# EAGLE board repeater_opto (EAGLE 8.4.1)
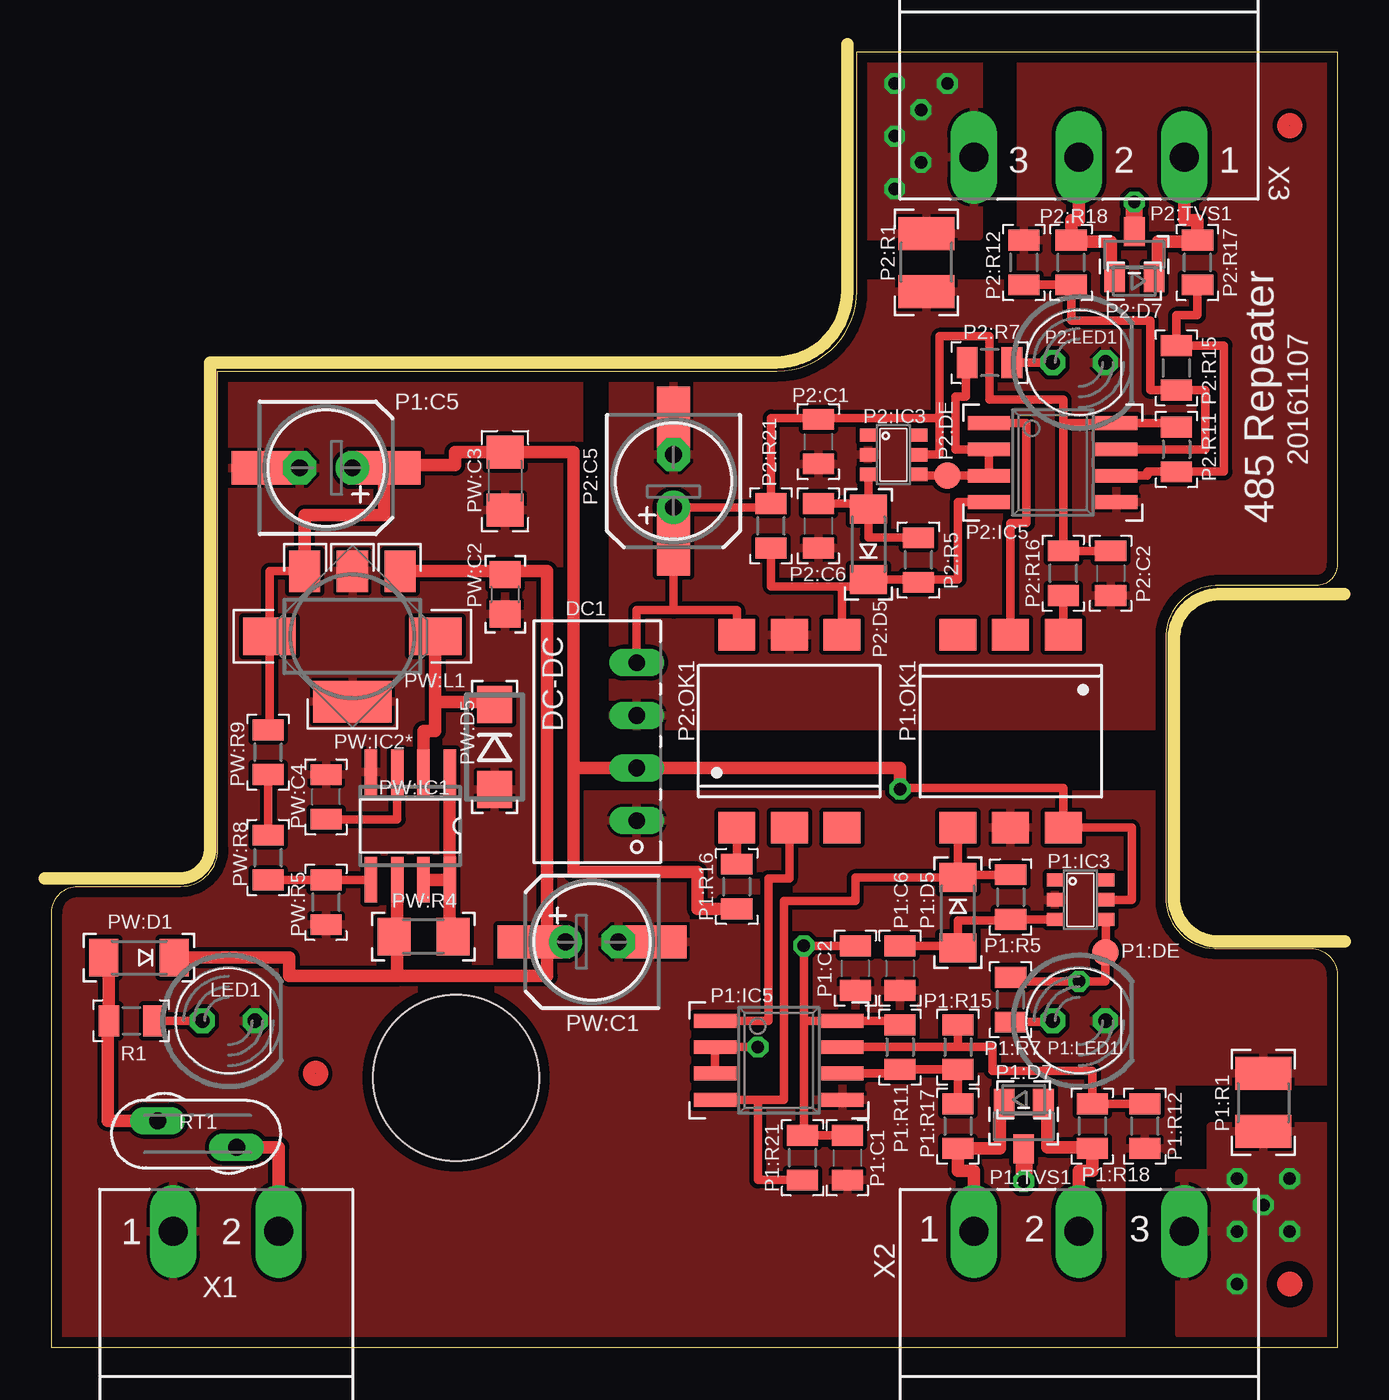
[diagram p0: board, top side]
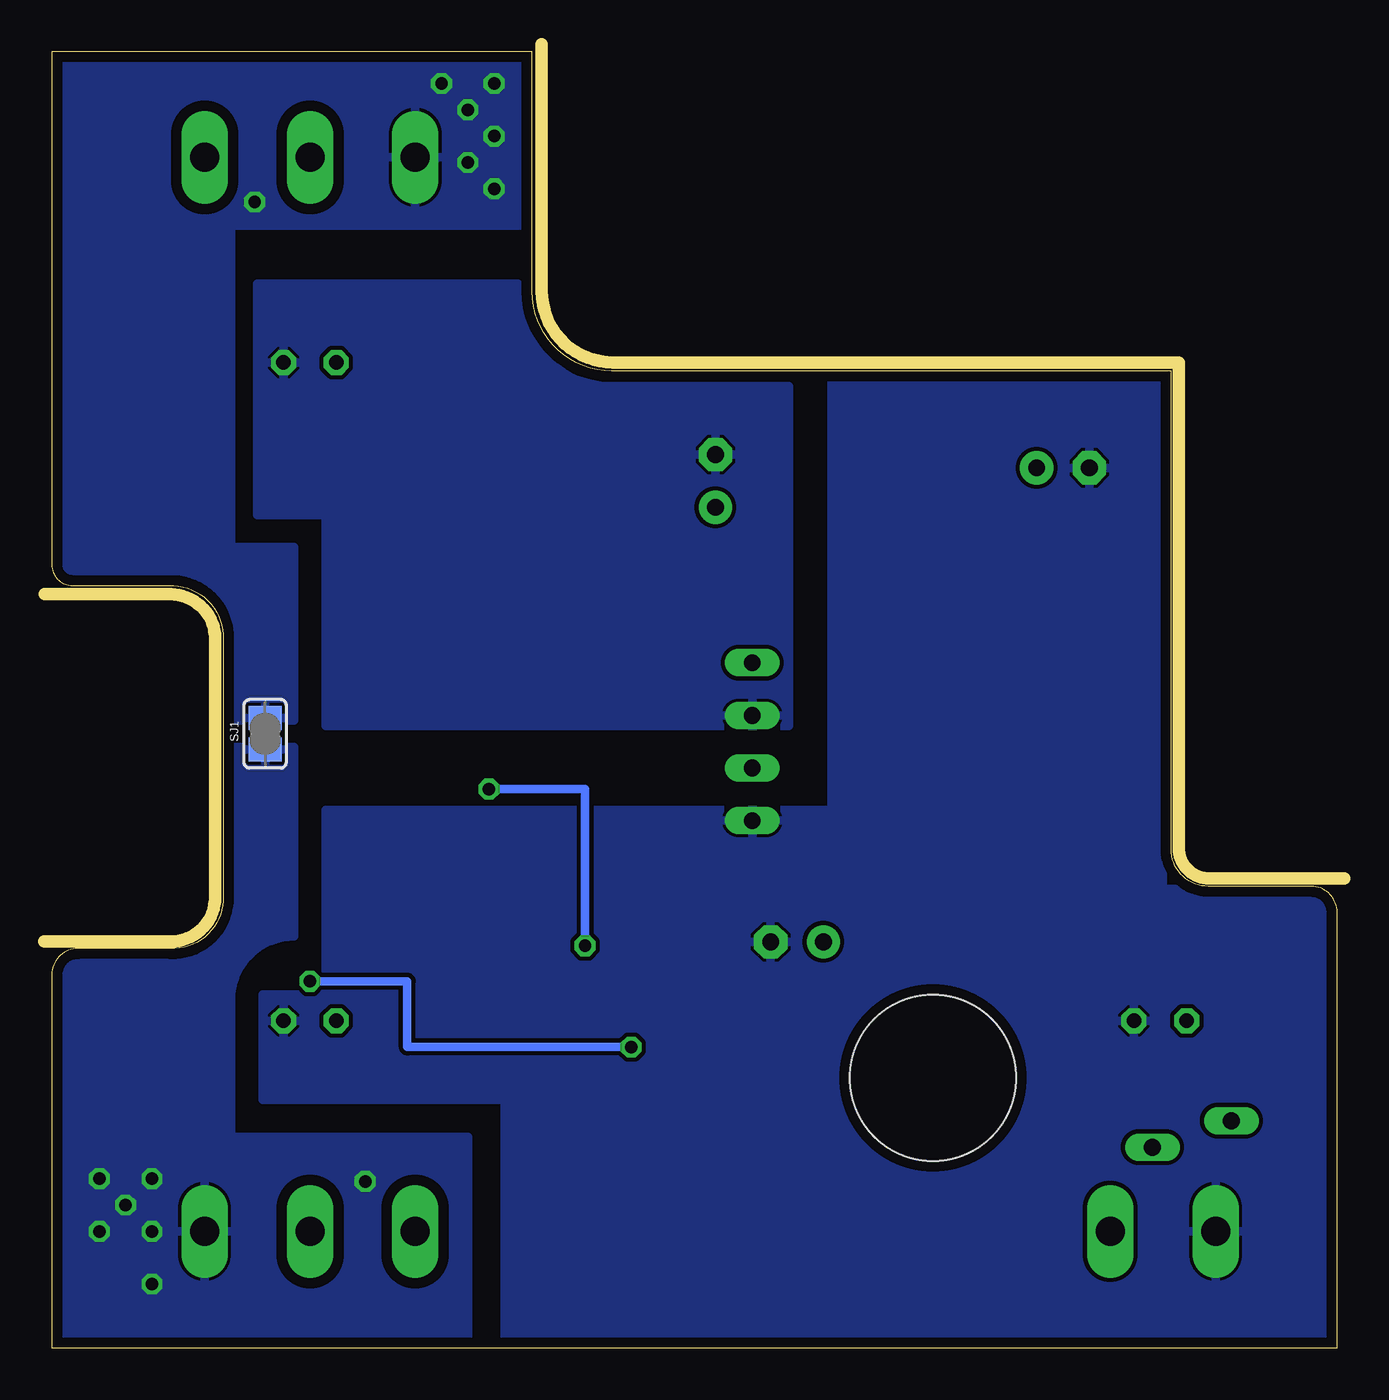
[diagram p1: board, bottom side, seen from below]

Size 62 x 62.51 mm. Coordinates in mm from the lower left corner, seen from the top.
Copper layers (1*16): Top 0.035mm / dielectric 1.5mm / Bottom 0.035mm
Design rules "default *": minimum track width 10mil, minimum drill 20mil, track to track 8mil, track to pad 8mil, pad to pad 8mil, via to via 8mil, smd to smd 8mil, copper to edge 20mil, drill to drill 8mil, minimum pad ring 10mil, minimum via ring 8mil, stop-mask expansion 4mil, vias tented up to drill 40mil, thermal gap 6mil
Net classes: 0 default: clearance 0.205 mm; 1 power: clearance 0.305 mm to class 0, clearance 0.305 mm; 2 pe: clearance 0.508 mm to class 0, clearance 0.508 mm to class 1, clearance 0.508 mm
Milling: 11 lines

## Footprints (pad centres in the part's own frame; a part is rotated, then mirrored left to right if it is on the bottom)
NME = drill 0.813 long: 1 0,3.81; 2 0,1.27; 3 0,-1.27; 4 0,-3.81
LED5MM = drill 0.7 octagon: A -1.27,0; K 1.27,0
C0805 = smd 1 x 1.5: 1 -1.077,0; 2 1.077,0
SANYO-OSCON_SMD_C6 = smd 3.5 x 1.6: + 2.8,0; - -2.8,0
E2,5-6 = drill 0.813 pad 1.6: + -1.27,0 | drill 0.813 pad 1.6 octagon: - 1.27,0
MINIMELF = smd 1.4 x 1.8: A 1.7,0; C -1.7,0
SOD323-R = smd 0.6 x 0.6: A 1.1,0; C -1.1,0
B1,27 = smd 1.27 x 1.27: PP 0,0
SOT23-6 = smd 0.64 x 0.8: 1 -0.95,-1.29; 2 0,-1.29; 3 0.95,-1.29; 4 0.95,1.173; 5 0,1.173; 6 -0.95,1.173
ESOP-8 = smd 0.66 x 2.032: 1 -1.905,-3.073; 2 -0.635,-3.073; 3 0.635,-3.073; 4 1.905,-3.073; 5 1.905,3.073; 6 0.635,3.073; 7 -0.635,3.073; 8 -1.905,3.073
DIL6-SMD = smd 1.78 x 1.52: 1 -2.54,-4.645; 2 0,-4.645; 3 2.54,-4.645; 4 2.54,4.645; 5 0,4.645; 6 -2.54,4.645
R1210 = smd 1.6 x 2.7: 1 -1.4,0; 2 1.4,0
R0805 = smd 1 x 1.5: 1 -1.077,0; 2 1.077,0
SOT23 = smd 1 x 1.4: 1 -0.95,-1.1; 2 0.95,-1.1; 3 0,1.1
C0805' = smd 1.3 x 1.5: 1 -0.95,0; 2 0.95,0
C1206 = smd 1.6 x 1.8: 1 -1.4,0; 2 1.4,0
DO214BA = smd 1.8 x 1.7: A 2.05,0; C -2.05,0
SO08 = smd 0.6 x 2.2: 1 -1.905,-2.6; 2 -0.635,-2.6; 3 0.635,-2.6; 4 1.905,-2.6; 5 1.905,2.6; 6 0.635,2.6; 7 -0.635,2.6; 8 -1.905,2.6
SOT223 = smd 1.5 x 2: 1 -2.3,-3.15; 2 0,-3.15; 3 2.3,-3.15 | smd 3.8 x 2: 4 0,3.15
DR1030 = smd 2.54 x 1.8: 1 -4,0; 2 4,0
R1206 = smd 1.6 x 1.803: 1 -1.422,0; 2 1.422,0
X40 = drill 0.813 long: 1 0,0; 2 3.81,-1.27
SJ = smd 1.168 x 1.6: 1 -0.762,0; 2 0.762,0
PLOKSTE_ISPJAUTA = hole 8: -11,-18
MSTBA2 = drill 1.4 long: 1 -2.54,5.08; 2 2.54,5.08
MSTBA3 = drill 1.4 long: 1 -5.08,5.08; 2 0,5.08; 3 5.08,5.08

## Placement (x,y rotation side)
DC1  5V/5V  [NME]  28.21,29.23 180 top
LED1  Power  [LED5MM]  8.53,15.77 0 top
P1:C1  0.1  [C0805]  38.37,9.16 270 top
P1:C2  0.1  [C0805]  38.76,18.31 270 top
P1:C5  100x16V  [SANYO-OSCON_SMD_C6]  13.23,42.44 0 top
P1:C6  0.1  [C0805]  40.91,18.31 270 top
P1:C7  100x16V  [E2,5-6]  13.23,42.44 180 top
P1:D5  BAS85  [MINIMELF]  43.71,20.97 270 top
P1:D7  PESD1LIN  [SOD323-R]  46.88,11.96 0 top
P1:DE  TPB1,27  [B1,27]  50.82,19.07 0 top
P1:IC3  74LVC2G14DBV  [SOT23-6]  49.68,21.61 270 top
P1:IC5  MAX485CSA  [ESOP-8]  35.07,13.86 270 top
P1:LED1  Link  [LED5MM]  49.55,15.77 0 top
P1:OK1  H11L1MS  [DIL6-SMD]  46.25,29.74 180 top
P1:R1  100  [R1210]  58.44,11.83 270 top
P1:R5  10k  [R0805]  46.25,21.74 270 top
P1:R7  10k  [R0805]  46.25,16.78 90 top
P1:R11  4.7k  [R0805]  40.91,14.5 270 top
P1:R12  4.7k  [R0805]  52.73,10.69 90 top
P1:R15  120  [R0805]  43.71,14.5 270 top
P1:R16  470  [R0805]  33.04,22.24 270 top
P1:R17  10  [R0805]  43.71,10.69 270 top
P1:R18  10  [R0805]  50.19,10.69 270 top
P1:R21  4k7  [R0805]  36.22,9.16 90 top
P1:TVS1  SM712  [SOT23]  46.88,10.69 180 top
P2:C1  0.1  [C0805]  36.98,43.71 270 top
P2:C2  0.1  [C0805]  51.07,37.36 270 top
P2:C5  100x16V  [SANYO-OSCON_SMD_C6]  29.99,41.8 270 top
P2:C6  0.1  [C0805]  36.98,39.64 270 top
P2:C7  100x16V  [E2,5-6]  29.99,41.8 90 top
P2:D5  BAS85  [MINIMELF]  39.39,38.75 90 top
P2:D7  PESD1LIN  [SOD323-R]  52.22,51.45 180 top
P2:DE  TPB1,27  [B1,27]  43.2,42.06 0 top
P2:IC3  74LVC2G14DBV  [SOT23-6]  40.66,43.07 270 top
P2:IC5  MAX485CSA  [ESOP-8]  48.28,42.69 270 top
P2:LED1  Link  [LED5MM]  49.55,47.52 0 top
P2:OK1  H11L1MS  [DIL6-SMD]  35.58,29.74 0 top
P2:R1  100  [R1210]  42.18,52.34 90 top
P2:R5  10k  [R0805]  41.8,37.99 90 top
P2:R7  10k  [R0805]  45.23,47.52 180 top
P2:R11  4.7k  [R0805]  54.25,43.33 270 top
P2:R12  4.7k  [R0805]  46.88,52.34 270 top
P2:R15  120  [R0805]  54.25,47.26 90 top
P2:R16  470  [R0805]  48.79,37.36 90 top
P2:R17  10  [R0805]  55.27,52.34 90 top
P2:R18  10  [R0805]  49.17,52.34 90 top
P2:R21  4k7  [R0805]  34.69,39.64 90 top
P2:TVS1  SM712  [SOT23]  52.22,52.72 0 top
PW:C1  47x50V  [SANYO-OSCON_SMD_C6]  26.05,19.58 180 top
PW:C2  10n  [C0805']  21.86,36.34 270 top
PW:C3  1.0  [C1206]  21.86,41.8 270 top
PW:C4  470  [C0805]  13.23,26.56 90 top
PW:C6  47x50V  [E2,5-6]  26.05,19.58 0 top
PW:D1  BAS32  [MINIMELF]  4.21,18.82 180 top
PW:D5  10MQ100  [DO214BA]  21.36,28.98 270 top
PW:IC1  MC34063AD  [SO08]  17.29,25.17 180 top
PW:IC2*  LM340-DCY  [SOT223]  14.5,34.31 180 top
PW:L1  330uH  [DR1030]  14.5,34.31 180 top
PW:R4  1.0  [R1206]  17.93,19.83 0 top
PW:R5  4k7  [R0805]  13.23,21.48 90 top
PW:R8  12k  [R0805]  10.43,23.64 90 top
PW:R9  2k  [R0805]  10.43,28.72 90 top
R1  4k7  [R0805]  3.83,15.77 0 top
RT1  400mA  [X40]  8.91,9.67 180 top
SJ1  [SJ]  51.71,29.61 90 bottom
U$2  [PLOKSTE_ISPJAUTA]  30.5,31.01 0 top
X1  POWER  [MSTBA2]  8.4,0.53 0 top
X2  SIDE A  [MSTBA3]  49.55,0.53 0 top
X3  SIDE B  [MSTBA3]  49.55,62.5 180 top

## Library data of the parts
DC1 = dc-dc-converter
LED1 P1:LED1 P2:LED1 = led
P1:C1 P1:C2 P1:C6 P1:R1 P1:R5 P1:R7 P1:R11 P1:R12 P1:R15-P1:R18 P1:R21 P2:C1 P2:C2 P2:C6 P2:R1 P2:R5 P2:R7 P2:R11 P2:R12 P2:R15-P2:R18 P2:R21 R1 = rcl
P1:C5 P1:C7 P2:C5 P2:C7 PW:C1 PW:C6 = rcl; PRICE: 1.10
P1:D5 P2:D5 PW:D1 PW:D5 = diode
P1:D7 P1:IC3 P1:TVS1 P2:D7 P2:IC3 P2:TVS1 U$2 = repeater
P1:DE P2:DE = testpad
P1:IC5 P2:IC5 = linear; VENT_CODE: ZELM048
P1:OK1 P2:OK1 = optocoupler
PW:C2 = touch; NOM_NR: ZKN
PW:C3 PW:C4 PW:R5 PW:R8 PW:R9 = rcl; PRICE: 0.01
PW:IC1 = touch; VENT_CODE: ZELM041
PW:IC2* PW:L1 = touch
PW:R4 = touch; NOM_NR: ZELRS019; PRICE: 0.02
RT1 = descreet
SJ1 = jumper
X1-X3 = con-phoenix-508

## Nets
+24V [power]: PW:D1.A R1.1 RT1.2
GND1: DC1.1 LED1.K P1:C1.2 P1:C2.2 P1:C5.- P1:C6.2 P1:C7.- P1:IC3.2 P1:IC5.5 P1:LED1.K P1:OK1.5 P1:R1.1 P1:R12.1 PW:C1.- PW:C2.2 PW:C3.2 PW:C4.2 PW:C6.- PW:D5.A PW:IC1.4 PW:IC2*.2 PW:IC2*.4 PW:R5.1 X1.1
GND2: DC1.3 P2:C1.2 P2:C2.2 P2:C5.- P2:C6.2 P2:C7.- P2:IC3.2 P2:IC5.5 P2:LED1.K P2:OK1.5 P2:R1.1 P2:R12.1
N$1: LED1.A R1.2
N$2 [power]: RT1.1 X1.2
N$12: P1:R16.1 P2:OK1.1
N$13: P1:IC5.1 P2:OK1.2
N$14: P1:OK1.1 P2:R16.1
N$15: P1:OK1.2 P2:IC5.1
P1:LED+: P1:DE.PP P1:IC3.4 P1:IC5.2 P1:IC5.3 P1:R7.2
P1:N$1: P1:LED1.A P1:R7.1
P1:N$2: P1:IC5.7 P1:R12.2 P1:R15.1 P1:R18.1
P1:N$3: P1:IC5.6 P1:R11.2 P1:R15.2 P1:R17.1
P1:N$7: P1:C6.1 P1:D5.A P1:IC3.3 P1:R5.2
P1:RX: P1:D5.C P1:IC5.4 P1:OK1.4 P1:R5.1 P1:R21.1
P2:LED+: P2:DE.PP P2:IC3.4 P2:IC5.2 P2:IC5.3 P2:R7.2
P2:N$1: P2:LED1.A P2:R7.1
P2:N$2: P2:IC5.7 P2:R12.2 P2:R15.1 P2:R18.1
P2:N$3: P2:IC5.6 P2:R11.2 P2:R15.2 P2:R17.1
P2:N$7: P2:C6.1 P2:D5.A P2:IC3.3 P2:R5.2
P2:RX: P2:D5.C P2:IC5.4 P2:OK1.4 P2:R5.1 P2:R21.1
PE1 [pe]: P1:R1.2 P1:TVS1.3 SJ1.1 X2.3
PE2 [pe]: P2:R1.2 P2:TVS1.3 SJ1.2 X3.3
PW:N$2 [power]: PW:C1.+ PW:C2.1 PW:C6.+ PW:D1.C PW:IC1.6 PW:IC2*.1 PW:R4.1
PW:N$29 [power]: PW:IC1.1 PW:IC1.7 PW:IC1.8 PW:R4.2
PW:N$30: PW:C4.1 PW:IC1.3
PW:N$33: PW:R8.2 PW:R9.1
PW:N$34: PW:IC1.5 PW:R5.2 PW:R8.1
PW:N$35 [power]: PW:D5.C PW:IC1.2 PW:L1.1
RS1A: P1:D7.C P1:R17.2 P1:TVS1.2 X2.1
RS1B: P1:D7.A P1:R18.2 P1:TVS1.1 X2.2
RS2A: P2:D7.C P2:R17.2 P2:TVS1.2 X3.1
RS2B: P2:D7.A P2:R18.2 P2:TVS1.1 X3.2
VCC1 [power]: DC1.2 P1:C1.1 P1:C2.1 P1:C5.+ P1:C7.+ P1:IC3.5 P1:IC5.8 P1:OK1.6 P1:R11.1 P1:R16.2 P1:R21.2 PW:C3.1 PW:IC2*.3 PW:L1.2 PW:R9.2
VCC2 [power]: DC1.4 P2:C1.1 P2:C2.1 P2:C5.+ P2:C7.+ P2:IC3.5 P2:IC5.8 P2:OK1.6 P2:R11.1 P2:R16.2 P2:R21.2

## Tracks (layer width: path | path; a pad name or v marks a point on that pad's centre or on a via)
+24V
  Top 0.61: RT1.2 2.69,10.94 2.69,15.77 R1.1 2.75,18.82 PW:D1.A
GND1
  pour Top: 51.58,0.53 0.02,0.53 0.02,20.85 0.04,20.85 0.02,46.88 arc-1 25.42,46.63 25.42,26.69 62.25,26.69 62.25,12.85 53.99,12.85 53.99,9.54 51.58,9.54
  pour Bottom: 0.02,0.02 0.02,22.12 8.4,22.12 8.4,47.01 24.4,47.01 24.4,25.93 48.79,25.93 48.79,17.04 51.84,17.04 51.84,11.96 40.15,11.96 40.15,0.02
GND2
  pour Top: 27.07,46.76 34.31,46.76 34.31,51.33 46.76,51.33 46.76,62.76 62.25,62.76 62.25,29.99 27.07,29.99
  pour Bottom: 26.44,29.99 48.79,29.99 48.79,40.15 52.09,40.15 52.09,51.33 39.52,51.33 39.52,50.92 arc-90 34.97,46.38 26.44,46.38
N$1
  Top 0.406: LED1.A R1.2
N$2
  Top 0.61: X1.2 10.94,9.67 RT1.1
N$3
  Bottom 0.406: 51.71,29.99 51.71,29.36
N$12
  Top 0.406: P1:R16.1 P2:OK1.1
N$13
  Top 0.406: P1:IC5.1 34.56,15.77 34.56,22.63 35.58,22.63 P2:OK1.2
N$14
  Top 0.406: P1:OK1.1 P2:R16.1
N$15
  Top 0.406: P2:IC5.1 47.01,44.6 47.01,39.77 46.25,39.77 P1:OK1.2
P1:LED+  (via drill 0.6)
  Top 0.406: P1:IC5.3 P1:IC5.2 v34.06,14.5 | P1:IC3.4 50.85,19.07 P1:DE.PP 50.82,17.67 v49.55,17.67 46.25,17.67 P1:R7.2
  Bottom 0.406: v34.06,14.5 44.85,14.5 44.85,17.67 v49.55,17.67
P1:N$1
  Top 0.406: P1:R7.1 48.28,15.71 P1:LED1.A
P1:N$2
  Top 0.406: P1:IC5.7 43.71,14.5 | 43.71,14.5 P1:R15.1 | P1:R12.2 P1:R18.1 50.19,13.35 45.36,13.35 45.36,14.5 43.71,14.5
P1:N$3
  Top 0.406: P1:R17.1 P1:R15.2 P1:R11.2 40.91,13.23 P1:IC5.6
P1:N$7
  Top 0.406: 43.71,18.88 P1:D5.A | P1:D5.A 43.71,20.61 46.25,20.61 P1:R5.2 P1:IC3.3 | P1:C6.1 43.71,19.38 P1:D5.A
P1:RX
  Top 0.406: P1:IC5.4 34.06,11.96 | 34.06,11.96 35.33,11.96 35.33,21.54 38.76,21.54 38.76,22.68 P1:D5.C | P1:R5.1 43.71,22.81 P1:D5.C | P1:OK1.4 P1:D5.C | 34.06,11.96 34.06,8.09 P1:R21.1
P2:LED+
  Top 0.406: P2:IC3.4 41.83,42.06 42.69,42.06 P2:DE.PP P2:IC5.3 P2:IC5.2 43.58,43.33 43.58,45.87 44.09,45.87 44.09,47.52 P2:R7.2
P2:N$1
  Top 0.406: P2:R7.1 P2:LED1.A
P2:N$2
  Top 0.406: P2:R12.2 P2:R18.1 49.17,49.55 52.98,49.55 52.98,46.19 P2:R15.1 55.65,46.19 55.65,43.33 P2:IC5.7
P2:N$3
  Top 0.406: P2:IC5.6 52.85,42.06 52.85,42.25 P2:R11.2 56.53,42.25 56.53,48.34 P2:R15.2 54.25,49.8 55.27,49.8 P2:R17.1
P2:N$7
  Top 0.406: P2:D5.A 39.39,40.73 | P2:D5.A 39.39,39.9 39.39,39.07 P2:R5.2 | P2:IC3.3 39.39,42.12 P2:D5.A | P2:C6.1 39.39,40.72 P2:D5.A
P2:RX
  Top 0.406: P2:IC5.4 43.71,40.79 43.71,37.05 41.93,37.05 | 39.39,36.79 P2:D5.C | P2:OK1.4 38.12,36.72 | 38.12,36.72 39.39,36.72 P2:D5.C | P2:D5.C 41.93,37.05 | P2:R5.1 41.93,36.92 41.93,37.05 | 38.12,36.72 34.69,36.72 P2:R21.1
PE1  (via drill 0.6)
  Top 0.813: P1:TVS1.3 v46.88,8.02
  other vias: 57.17,5.61 57.17,3.07 59.71,5.61 58.44,6.88 59.71,8.15 57.17,8.15
  pour Bottom: 41.93,0.02 41.93,10.18 53.36,10.18 53.36,16.78 arc90 50.31,19.83 50.31,28.98 53.61,28.98 53.61,21.67 arc90 55.96,19.32 62.25,19.32 62.25,0.02
  pour Top: 54.38,8.4 55.9,8.4 55.9,10.69 61.62,10.69 61.62,0.65 54.38,0.65
PE2  (via drill 0.6)
  Top 0.813: P2:TVS1.3 v52.22,55.27
  other vias: 40.66,55.9 41.93,57.17 40.66,58.44 41.93,59.71 40.66,60.98 43.2,60.98
  pour Bottom: 50.31,30.25 50.31,38.63 53.36,38.63 53.36,54.12 38.88,54.12 38.88,62.76 61.74,62.76 61.74,36.85 55.77,36.85 arc90 53.61,34.69 53.61,30.25
  pour Top: 38.88,62.76 44.72,62.76 44.72,53.61 38.88,53.61
PW:N$2
  Top 0.406: PW:C6.+ 23.9,19.58 | PW:C2.1 21.61,37.29 21.61,37.46
  Top 0.61: 23.9,19.58 23.9,17.93 16.66,17.93 | PW:C1.+ 23.9,19.58 | 23.9,19.58 23.9,37.46 21.61,37.46 PW:IC2*.1 | 16.66,19.58 PW:IC1.6 | PW:R4.1 16.66,19.58 | 16.66,19.58 16.66,17.93 | PW:D1.C 11.45,18.82 11.45,17.93 16.66,17.93
PW:N$29
  Top 0.61: PW:IC1.1 PW:IC1.8 | PW:IC1.7 PW:IC1.8 | PW:IC1.8 19.2,19.83 PW:R4.2
PW:N$30
  Top 0.406: PW:C4.1 16.66,25.49 PW:IC1.3
PW:N$33
  Top 0.406: PW:R9.1 PW:R8.2
PW:N$34
  Top 0.406: PW:IC1.5 12.97,22.57 PW:R5.2 12.97,22.56 PW:R8.1
PW:N$35
  Top 0.61: PW:IC1.2 17.93,29.74 18.5,29.74 18.5,31.13 | 21.36,31.01 PW:D5.C 21.36,31.13 18.5,31.13 | PW:L1.1 18.5,31.13
RS1A
  Top 0.406: 45.74,11.79 P1:TVS1.2 45.93,11.96 P1:D7.C
  Top 0.61: X2.1 44.47,8.53 43.71,8.53 P1:R17.2 45.74,9.61 45.74,11.79
RS1B
  Top 0.406: 48.03,11.79 P1:TVS1.1 47.83,11.96 P1:D7.A | 50.19,9.67 P1:R18.2
  Top 0.61: X2.2 49.55,8.53 50.19,8.53 P1:R18.2 | 48.03,11.79 48.03,9.67 50.19,9.67
RS2A
  Top 0.406: P2:TVS1.2 53.32,51.62 | 55.27,53.36 P2:R17.2 | 53.36,51.62 53.32,51.62 | 53.32,51.62 P2:D7.C
  Top 0.61: X3.1 54.63,54.38 55.27,54.38 P2:R17.2 | 53.36,51.62 53.36,53.36 55.27,53.36
RS2B
  Top 0.406: P2:TVS1.1 51.12,51.62 | 49.17,53.36 P2:R18.2 | 51.07,51.62 51.12,51.62 | 51.12,51.62 P2:D7.A
  Top 0.61: X3.2 49.55,54.38 49.17,54.38 P2:R18.2 | 51.07,51.62 51.07,53.36 49.17,53.36
VCC1  (via drill 0.6)
  Top 0.406: PW:IC2*.3 10.5,37.46 PW:L1.2 10.5,29.8 PW:R9.2 | P1:IC3.5 52.09,21.61 52.09,25.09 P1:OK1.6 48.79,27 40.91,27 v40.91,26.94 | P1:R11.1 40.91,15.77 P1:IC5.8 36.28,15.77 | P1:C2.1 v36.28,19.38 | 36.28,15.77 v36.28,19.38 | P1:C1.1 P1:R21.2 36.28,10.24 36.28,15.77 | v36.28,19.38 v36.28,19.39
  Top 0.61: PW:IC2*.3 12.2,40.15 16.03,40.15 P1:C5.+ | P1:C7.+ P1:C5.+ | P1:C5.+ 16.79,42.56 19.45,42.56 19.45,43.2 20.34,43.2 PW:C3.1 25.17,43.2 25.17,27.96 | 25.17,27.96 DC1.2 40.91,27.96 v40.91,26.94 | 25.17,27.96 25.17,22.95 31.13,22.95 31.13,21.17 P1:R16.2
  Bottom 0.406: v40.91,26.94 36.28,26.94 v36.28,19.39
VCC2
  Top 0.406: P2:C2.1 P2:R16.2 48.79,44.6 | P2:R11.1 54.25,44.6 P2:IC5.8 48.79,44.6 | 36.98,44.85 34.69,44.85 P2:R21.2 34.69,40.53 P2:C7.+ P2:C5.+ 29.99,35.58 | 36.98,44.85 42.82,44.85 | P2:OK1.6 33.04,35.58 29.99,35.58 | 29.99,35.58 28.21,35.58 DC1.4 | 48.79,44.6 48.79,45.74 45.23,45.74 45.23,48.79 42.82,48.79 42.82,44.85 | P2:IC3.5 42.82,43.07 42.82,44.85 | P2:C1.1 36.98,44.85
(copper drawn outside any net)
  shapes: Top circle x3

## Text on the board
tPlace: 20161107 | 485 Repeater
Dezute: PE2 | B2 | A2 | LINE ACTIVITY | POWER | A1 | B1 | PE1 | COM | +24V